# Altium PCB I2C_Shield.PcbDoc
Units mil, origin at the board's own origin, x right, y up, seen from the top; angles counter-clockwise.
Board outline 2112.03 x 2253.37 mil, 2 copper layers (Top Layer, Bottom Layer); 32 components, 38 nets, 115 pads, 41 vias.
Unrouted connection lines stored in the file: 7.
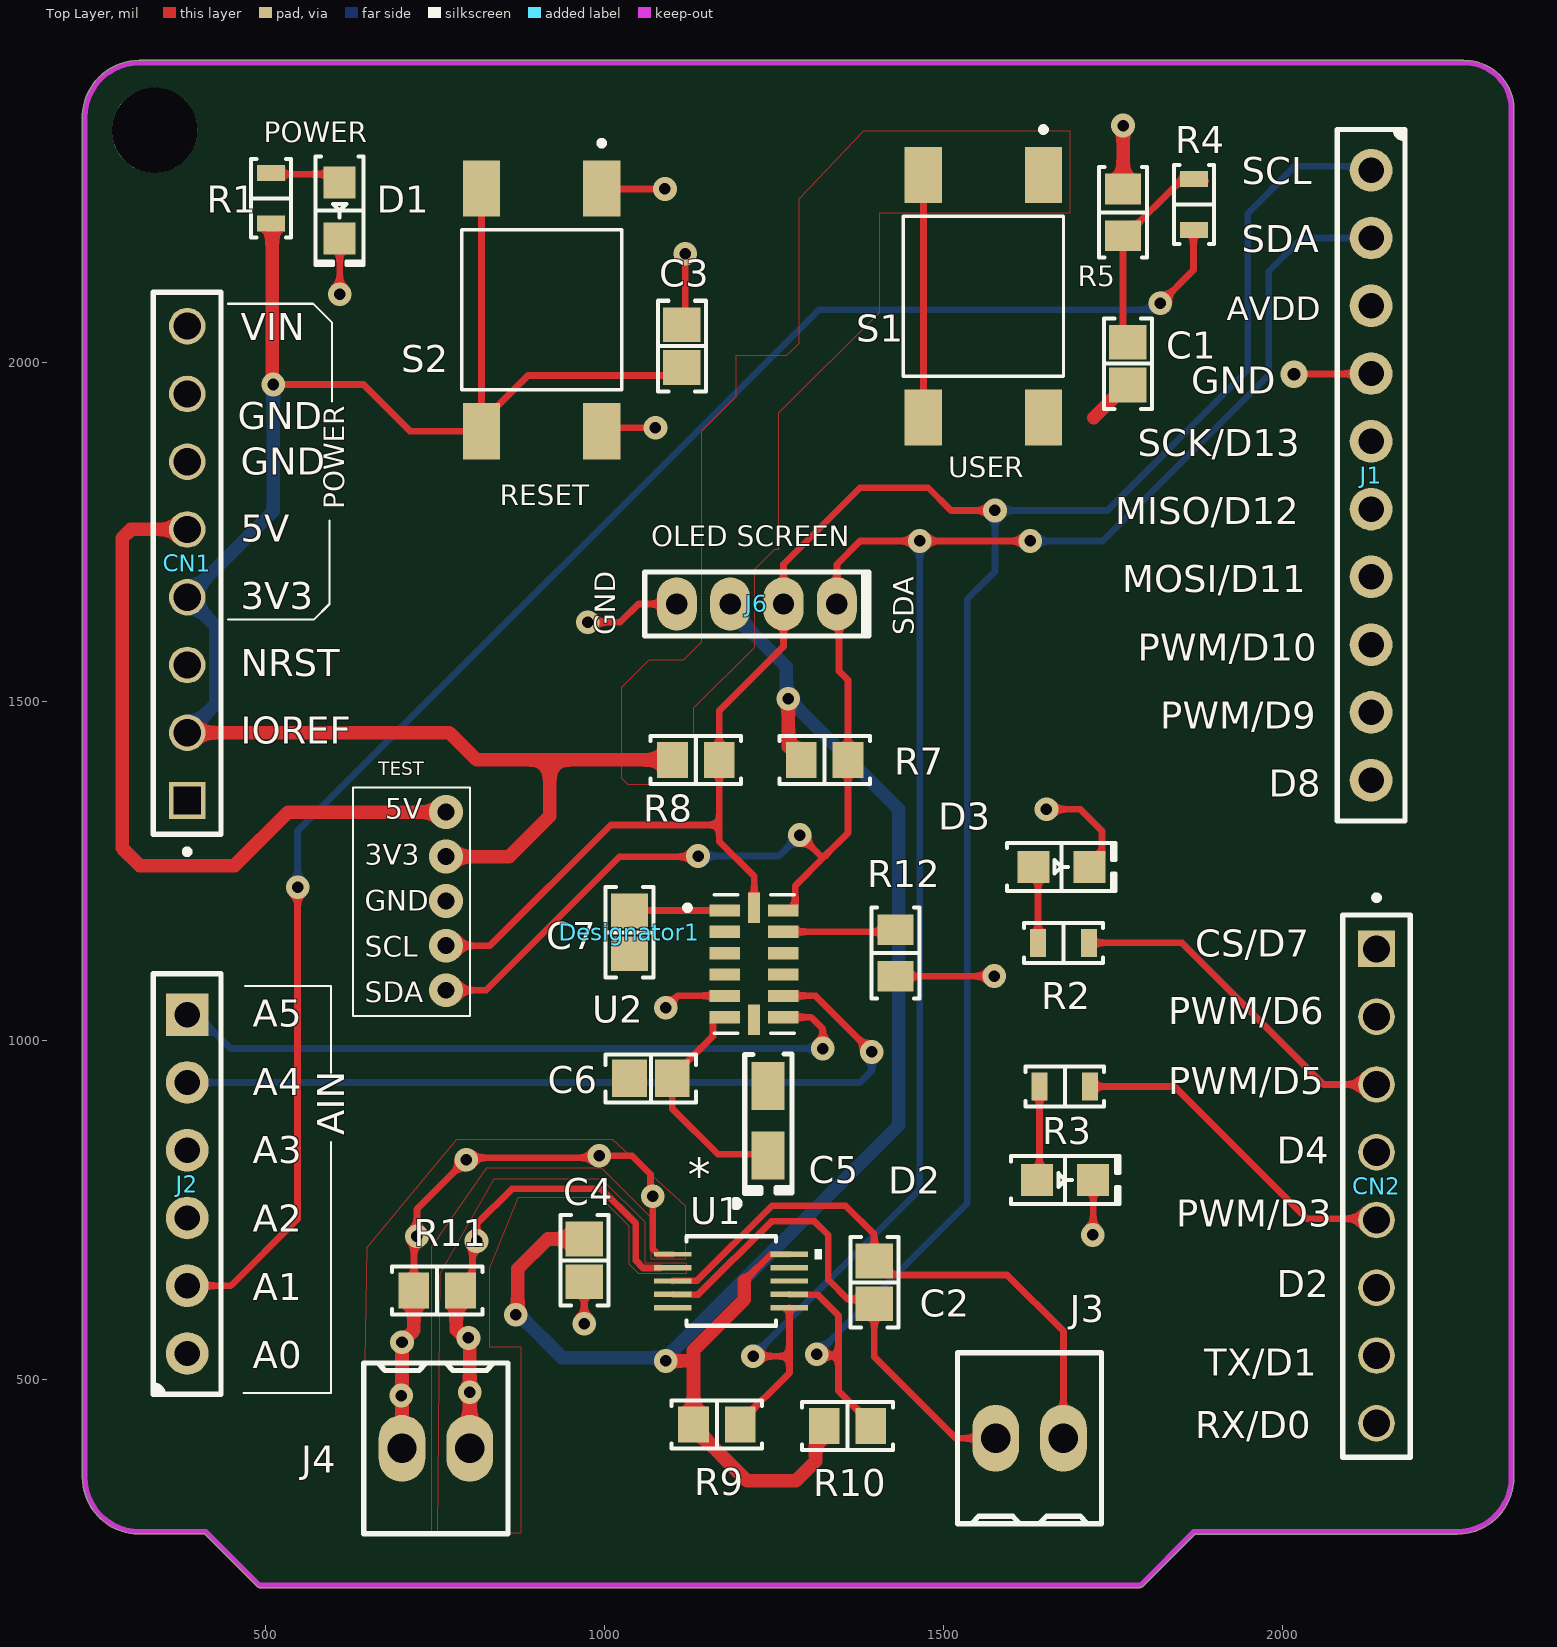
[diagram p0: Top Layer view]
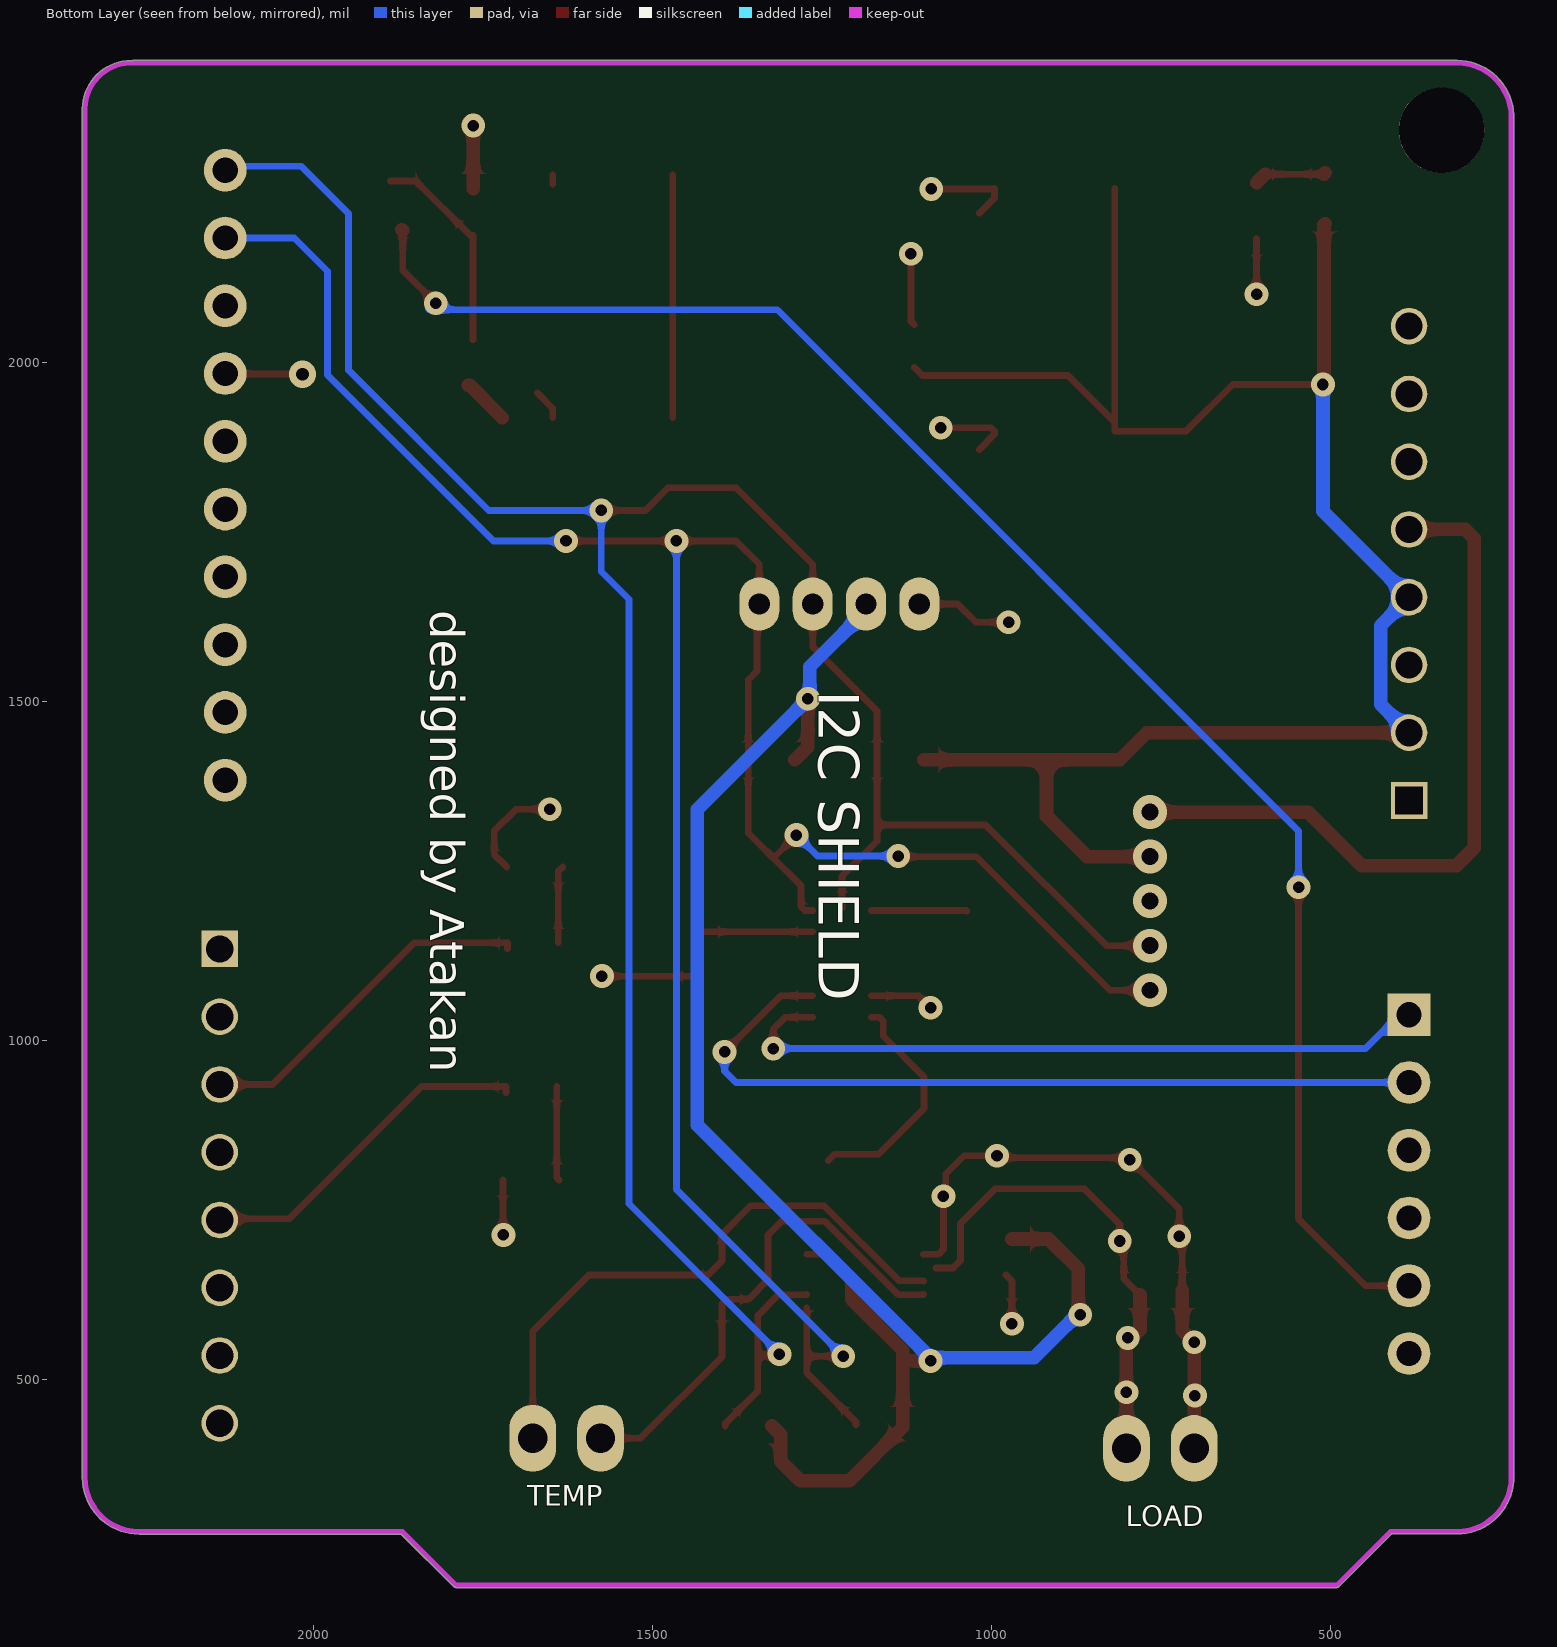
[diagram p1: Bottom Layer view, seen from below]
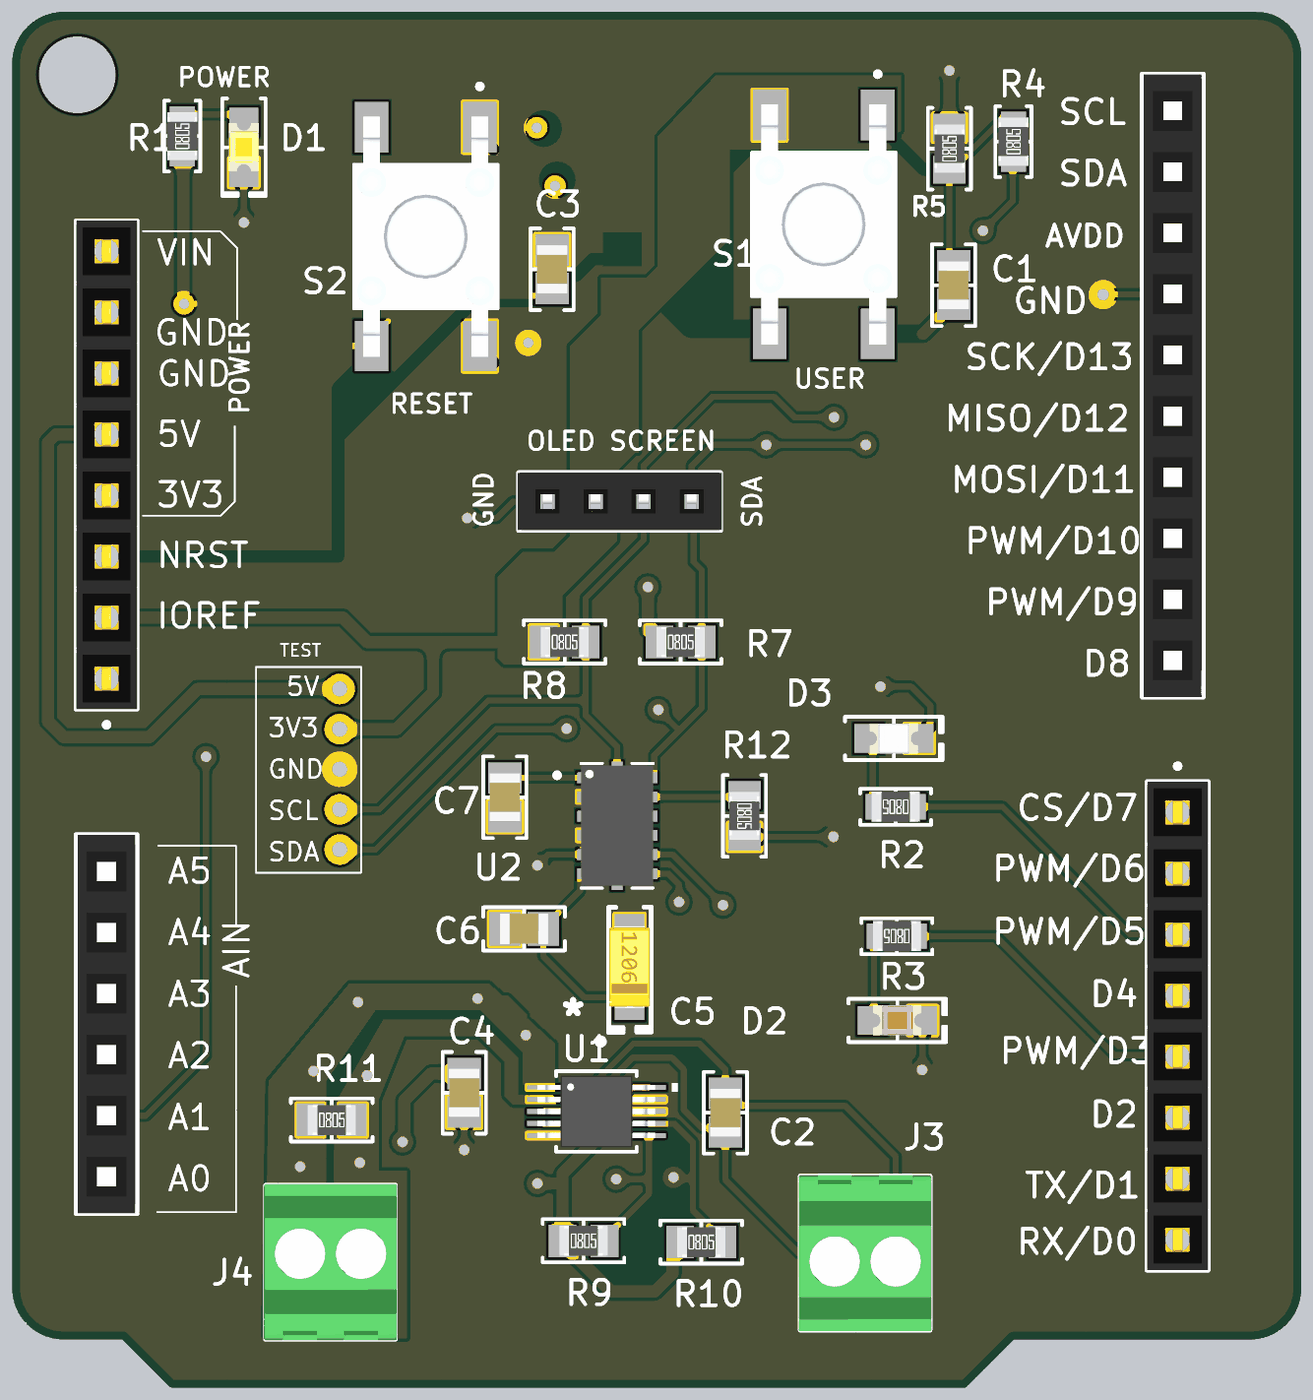
[diagram p2: 3D render of the assembled board from above, using the file's embedded part models]

## Layer stack, top to bottom
Top Solder: solder mask 0.4, Solder Resist, Dk 3.5
Top Layer: signal copper 1.4
Dielectric 1: dielectric 12.6, FR-4, Dk 4.8
Bottom Layer: signal copper 1.4
Bottom Solder: solder mask 0.4, Solder Resist, Dk 3.5

## Board outline
229.49,355.48 ccw(c313.26,355.48) 313.26,271.71 409.87,271.71 487.46,194.13 ccw(c491.01,197.68) 491.01,192.65 1790.23,192.65 ccw(c1790.23,197.68) 1793.78,194.13 1871.05,271.4 2257.71,271.4 ccw(c2257.74,273.91) 2257.74,271.39 ccw(c2257.74,355.17) 2341.52,355.17 2341.52,2374.23 ccw(c2269.88,2374.23) 2269.88,2445.87 2268.06,2445.87 ccw(c2267,2440.95) 2267,2445.98 313.88,2445.98 ccw(c313.26,2440.99) 313.26,2446.02 ccw(c313.26,2362.25) 229.53,2364.81 ccw(c234.52,2364.18) 229.49,2364.18 229.49,355.5 ccw(c232,355.48)

## Design rules (kind name [scope] priority, off if disabled: settings)
Clearance [All] p1: gap=5 ignorepadtopadclearanceinfootprint=FALSE except(0: Fill-Hole Poly-Hole Region-Hole Text-Hole; 10: Text-Text)
ComponentClearance [All] p1: gap=10 collisioncheckmode=3 verticalgap=-100 showdistances=FALSE
HoleSize [All] p1: absolutevalues=TRUE maxlimit=200 minlimit=6 maxpercent=80.000 minpercent=20.000
MinimumSolderMaskSliver [All] p1: minsoldermaskwidth=3.14
PolygonConnect [All] p1: connectstyle=Direct reliefconductorwidth=10 reliefentries=4 polygonreliefangle="90 Angle" airgapwidth=10
RoomDefinition I2C_Shield [InComponentClass('I2C_Shield')] p1: confinementstyle=ConfineIn formatcopy=TRUE lockcomponents=FALSE outline -3820,-1341 -1820,-1341 -1820,-341 -3820,-341
RoutingVias [All] p1: holewidth=17 width=35 viastyle="Through Hole" minholewidth=15 minwidth=30 maxholewidth=28 maxwidth=50
SilkToSilkClearance [All] p1: silktosilkclearance=5.5
SilkToSolderMaskClearance [IsText] p1: minsilkscreentomaskgap=4 clearancetoexposedcopper=TRUE
SolderMaskExpansion [All] p1: expansion=4
Width [All] p1: maxlimit=30 minlimit=10 preferedwidth=20 minimp=50.000000 maximp=50.000000 favimp=50.000000
25 further rules are at their usual default settings.

## Components (designator, comment, footprint, x,y, rotation, side; value= is the part's Value field where it differs from the comment)
C1 "0.1 µF" "CAP 0805_2012" 1772,1998.52 r270 top
C2 "470 pF" "CAP 0805_2012" 1398,643 r270 top
C3 "0.1 µF" "CAP 0805_2012" 1114,2024.52 r90 top
C4 "0.1 µF" "CAP 0805_2012" 970,675.5 r270 top
C5 "10 µF" "CAP POL 1206_3216" 1241,881.43 r90 top
C6 "0.1µF" "CAP 0805_2012" 1068.13,944 r180 top
CN1 "8x1_Header_2.54" 8X1_HEADER#1 384,1704 r90 top
CN2 "8x1_Header_2.54" 8X1_HEADER#2 2139,785 r270 top
D1 "Yellow" "LED 0805_2012 YELLOW" 609,2224.34 r270 top
D2 "Red" "LED 0805_2012 RED" 1679.66,794 r0 top
D3 "White" "LED 0805_2012" 1674,1256 r0 top
Designator1 "0.1µF" "CAP 0805_2012" 1036.63,1159.5 r270 top (schematic designator C7)
J1 "SSW-110-03-T-S" "SAMTEC SSW-110-03-T-S" 2131,1834 r270 top
J2 "SSW-106-03-T-S" "SAMTEC SSW-106-03-T-S" 384,788 r90 top
J3 "282834-2" "TE 282834-2" 1627,413 r180 top
J4 "282834-2" "TE 282834-2" 751,398 r0 top
J6 "NPPN041BFCN-RC" "SULLINS NPPN041BFCN" 1224.63,1644 r180 top
R1 "470 Ohms" "YAGEO RES RK73 RS73 SG73 0805_2012" 508,2242.6 r90 top
R2 "470 Ohms" "YAGEO RES RK73 RS73 SG73 0805_2012" 1677,1144 r180 top
R3 "470 Ohms" "YAGEO RES RK73 RS73 SG73 0805_2012" 1679,932 r180 top
R4 "470 Ohms" "YAGEO RES RK73 RS73 SG73 0805_2012" 1870,2233.6 r90 top
R5 "10 kOhms" "RES 0805_2012" 1765.03,2222 r90 top
R7 "4.7k" "RES 0805_2012" 1324.63,1414 r0 top
R8 "4.7k" "RES 0805_2012" 1134.63,1414 r0 top
R9 "4.7k" "RES 0805_2012" 1165.55,433 r0 top
R10 "4.7k" "RES 0805_2012" 1358.45,431 r0 top
R11 "10 mOhms" "RES 0805_2012" 753,631 r0 top
R12 "10 kOhms" "RES 0805_2012" 1429.31,1129 r270 top
S1 "6MM_BUTON" 6MMTACTILESWITCH 1559,2098 r270 top
S2 "6MM_BUTON" 6MMTACTILESWITCH 907,2078 r270 top
U1 "LTC2990IMS#PBF" MSOP-10_MS 1186.61,645 r0 top
U2 "ADXL345BCCZ" IC_ADXL345BCCZ 1220.63,1113 r0 top

## Footprints (in the part's own frame and the unit in brackets; to place one, negate y for a bottom-side part, rotate by r counter-clockwise, add the part's x,y. Pads: shape width x height; smd on the part's side, far side on the other; paste and mask are expansions set on the pad)
6MMTACTILESWITCH [mm]
  rect 2.1x1.4 smd: 1(-4.55,2.25) 2(-4.55,-2.25) 3(4.55,2.25) 4(4.55,-2.25)
  silkscreen extent -6.35,-3 3,3, body extent -5,-3 5,3, height 9.5
8X1_HEADER#1 [mm]
  rect 1.37x1.37 hole 1.016 square: 01(-8.89,0)
  round 1.37 hole 1.02: 02(-6.35,0) 03(-3.81,0) 04(-1.27,0) 05(1.27,0) 06(3.81,0) 07(6.35,0) 08(8.89,0)
  silkscreen extent -10.91,-1.27 10.16,1.27, body extent -10.16,-1.27 10.16,1.27, height 8.5
8X1_HEADER#2 [mm]
  rect 1.37x1.37 hole 1.02: 01(-8.89,0)
  round 1.37 hole 1.02: 02(-6.35,0) 03(-3.81,0) 04(-1.27,0) 05(1.27,0) 06(3.81,0) 07(6.35,0) 08(8.89,0)
  silkscreen extent -10.91,-1.27 10.16,1.27, body extent -10.16,-1.27 10.16,1.27, height 8.5
"CAP 0805_2012" [mm] "Chip Capacitor, 2-Leads, Body 2.00x1.20mm, IPC Medium Density"
  rect 1.3x1.4 smd: 1(-0.8,0) 2(0.8,0)
  silkscreen extent -1.7,-0.9 1.7,0.9, body extent -1,-0.64 1,0.64, height 1.26
"CAP POL 1206_3216" [mm] "Molded Capacitor, 2-Leads, Body 3.20x1.6mm, IPC Medium Density"
  rect 1.8x1.23 smd: 1(-1.31,0) 2(1.31,0)
  silkscreen extent -3.22,-0.9 2.5,1.32, body extent -1.72,-0.85 1.71,0.85, height 1.7
IC_ADXL345BCCZ [mm]
  rect 1.145x0.457 smd: 1(-1.098,2) 2(-1.098,1.2) 3(-1.098,0.4) 4(-1.098,-0.4) 5(-1.098,-1.2) 6(-1.098,-2) 8(1.098,-2) 9(1.098,-1.2) 10(1.098,-0.4) 11(1.098,0.4) 12(1.098,1.2) 13(1.098,2)
  rect 0.457x1.145 smd: 7(0,-2.097) 14(0,2.097)
  silkscreen extent -2.6,-2.6 1.5,2.6, body extent -1.5,-2.5 1.5,2.5, height 1
"LED 0805_2012" [mm] "Chip Diode, 2-Leads, Body 2.00x1.25mm, IPC Medium Density"
  rect 1.2x1.2 smd: 1(-1.05,0) 2(1.05,0)
  silkscreen extent -2.03,-0.9 2.03,0.9, body extent -1,-0.62 1,0.63, height 0.9
"LED 0805_2012 RED" [mm] "Chip Diode, 2-Leads, Body 2.00x1.25mm, IPC Medium Density"
  rect 1.2x1.2 smd: 1(-1.05,0) 2(1.05,0)
  silkscreen extent -2.03,-0.9 2.03,0.9, body extent -1,-0.62 1,0.63, height 0.9
"LED 0805_2012 YELLOW" [mm] "Chip Diode, 2-Leads, Body 2.00x1.25mm, IPC Medium Density"
  rect 1.2x1.2 smd: 1(-1.05,0) 2(1.05,0)
  silkscreen extent -2.03,-0.9 2.03,0.9, body extent -1,-0.62 1,0.63, height 0.9
MSOP-10_MS [mil]
  rect 55x7 smd mask+4: 1(-86,39.4)
  rect 55x8 smd: 2(-86,19.7) 3(-86,0) 4(-86,-19.7) 5(-86,-39.4) 6(86,-39.4) 7(86,-19.7) 8(86,0) 9(86,19.7) 10(86,39.4)
  silkscreen extent -66,-66 134,66, body extent -96,-59 96,59, height 43
"RES 0805_2012" [mm] "Chip Resistor, 2-Leads, Body 2.00x1.25mm, IPC Medium Density"
  rect 1.15x1.35 smd: 1(-0.875,0) 2(0.875,0)
  silkscreen extent -1.7,-0.9 1.7,0.9, body extent -1,-0.62 1,0.63, height 0.6
"SAMTEC SSW-106-03-T-S" [mm]
  oval 1.6x1.6 hole 0.95: 1(-6.35,0) 2(-3.81,0) 3(-1.27,0) 4(1.27,0) 5(3.81,0)
  rect 1.6x1.6 hole 0.95: 6(6.35,0)
  silkscreen extent -7.88,-1.27 7.88,1.27, body extent -7.87,-1.21 7.87,1.21, height 8.51
"SAMTEC SSW-110-03-T-S" [mm]
  oval 1.6x1.6 hole 0.95: 1(-11.43,0) 2(-8.89,0) 3(-6.35,0) 4(-3.81,0) 5(-1.27,0) 6(1.27,0) 7(3.81,0) 8(6.35,0) 9(8.89,0) 10(11.43,0)
  silkscreen extent -12.96,-1.27 12.96,1.27, body extent -12.95,-1.21 12.95,1.21, height 8.51
"SULLINS NPPN041BFCN" [mm]
  oval 1.5x2 hole 0.8: 1(-3,0) 2(-1,0) 3(1,0) 4(3,0)
  silkscreen extent -4.2,-1.2 4.2,1.2, body extent -4.25,-1.2 4.25,1.2, height 4.41
"TE 282834-2" [mm]
  oval 1.75x2.5 hole 1.1: 1(-1.27,0) 2(1.27,0)
  silkscreen extent -2.7,-3.2 2.7,3.2, body extent -2.77,-3.25 2.77,3.25, height 10
"YAGEO RES RK73 RS73 SG73 0805_2012" [mm] "Chip Resistor, 2-Leads, Body 2.00x1.25mm"
  rect 0.6x1.05 smd: 1(-0.95,0) 2(0.95,0)
  silkscreen extent -1.48,-0.75 1.48,0.75, body extent -1,-0.62 1,0.63, height 0.6

## Part data
C1 C3: library part 0805B104K160CT, "CAP CER 0.1UF 16V X7R 0805", Device Package="0805 (2012 Metric)", Manufacturer="Walsin Technology Corporation", Operating Temperature="-55°C ~ 125°C", Supplier Part Number 1=1292-1565-1-ND, Temperature Coefficient=X7R, Tolerance=±10%, Voltage - Rated=16V, Applications="General Purpose", componentlink1description=Datasheet, componentlink1url=http://www.passivecomponent.com/wp-content/uploads/2018/10/MLCC.pdf, componentlink2description="DigiKey Link", componentlink2url=https://www.digikey.com/en/products/detail/walsin-technology-corporation/0805B104K160CT/9355062, lastupdated="9.02.2024 20:16:02", Lifecycle Status=Active, Minimum Order=1, Mounting Type="Surface Mount, MLCC", Package / Case="0805 (2012 Metric)", packaging=TapeAndReel, partid=4882, Part Number=0805B104K160CT, Part Status=Active, price=0.01, series=-, Size / Dimension="0.079\" L x 0.049\" W (2.00mm x 1.25mm)", Supplier 1=DigiKey, Thickness (Max)="0.035\" (0.90mm)"
  C1: Capacitance="0.1 µF"
C2: library part 885012207006, "CAP CER 470PF 10V X7R 0805", Device Package="0805 (2012 Metric)", Manufacturer="Würth Elektronik", Operating Temperature="-55°C ~ 125°C", Supplier Part Number 1=732-8016-1-ND, Temperature Coefficient=X7R, Tolerance=±10%, Voltage - Rated=10V, Applications="General Purpose", Capacitance="470 pF", componentlink1description=Datasheet, componentlink1url=https://katalog.we-online.de/pbs/datasheet/885012207006.pdf, componentlink2description="DigiKey Link", componentlink2url=https://www.digikey.com/en/products/detail/würth-elektronik/885012207006/5453871, lastupdated="9.02.2024 20:15:30", Lifecycle Status=Active, Minimum Order=1, Mounting Type="Surface Mount, MLCC", Package / Case="0805 (2012 Metric)", packaging=TapeAndReel, partid=42624, Part Number=885012207006, Part Status=Active, price=0.03, series=WCAP-CSGP, Size / Dimension="0.079\" L x 0.049\" W (2.00mm x 1.25mm)", Supplier 1=DigiKey, Thickness (Max)="0.035\" (0.90mm)"
C4: library part LMK212SD104KG-T, "CAP CER 0.1UF 10V 0805", Device Package="0805 (2012 Metric)", Manufacturer="Taiyo Yuden", Operating Temperature="-55°C ~ 125°C", Supplier Part Number 1=587-1134-1-ND, Tolerance=±10%, Voltage - Rated=10V, Applications="General Purpose", Capacitance="0.1 µF", componentlink1description=Datasheet, componentlink1url=http://www.yuden.co.jp/productdata/catalog/mlcc07_e.pdf, componentlink2description="DigiKey Link", componentlink2url=https://www.digikey.com/en/products/detail/taiyo-yuden/LMK212SD104KG-T/930486, Features="Low Distortion", lastupdated="9.02.2024 20:15:36", Lifecycle Status=Active, Minimum Order=1, Mounting Type="Surface Mount, MLCC", Package / Case="0805 (2012 Metric)", packaging=TapeAndReel, partid=14462, Part Number=LMK212SD104KG-T, Part Status=Active, price=0.06, series=CFCAP™, Size / Dimension="0.079\" L x 0.049\" W (2.00mm x 1.25mm)", Supplier 1=DigiKey, Thickness (Max)="0.053\" (1.35mm)"
C5: library part 593D106X9010A2TE3, "CAP TANT 10UF 10% 10V 1206", Device Package="1206 (3216 Metric)", ESR (Equivalent Series Resistance)=2Ohm, Manufacturer="Vishay Sprague", Manufacturer Size Code=A, Operating Temperature="-55°C ~ 125°C", Supplier Part Number 1=718-1969-1-ND, Tolerance=±10%, Voltage - Rated="10 V", Capacitance="10 µF", componentlink1description=Datasheet, componentlink1url=http://www.vishay.com/docs/40005/593d.pdf, componentlink2description="DigiKey Link", componentlink2url=https://www.digikey.com/en/products/detail/vishay-sprague/593D106X9010A2TE3/1579064, Features="General Purpose", Height - Seated (Max)="0.071\" (1.80mm)", lastupdated="3.06.2024 19:29:35", Lifecycle Status=Active, Minimum Order=1, Mounting Type="Surface Mount", Package / Case="1206 (3216 Metric)", packaging=TapeAndReel, partid=896, Part Number=593D106X9010A2TE3, Part Status=Active, price=0.09, series="TANTAMOUNT™, 593D", Size / Dimension="0.126\" L x 0.063\" W (3.20mm x 1.60mm)", Supplier 1=DigiKey, Type=Molded
C6 Designator1: library part 08053C104JAT4A, "CAP CER 0.1UF 25V X7R 0805", Device Package="0805 (2012 Metric)", Manufacturer="AVX Corporation", Operating Temperature="-55°C ~ 125°C", Supplier Part Number 1=478-13051-1-ND, Temperature Coefficient=X7R, Tolerance=±5%, Voltage - Rated=25V, Applications="General Purpose", Capacitance=0.1µF, componentlink1description=Datasheet, componentlink1url=http://datasheets.avx.com/X7RDielectric.pdf, componentlink2description="DigiKey Link", componentlink2url=http://digikey.com/product-detail/en/avx-corporation/08053C104JAT4A/478-13051-1-ND/9948569, lastupdated="2.09.2020 01:04:39", Lifecycle Status=Active, Minimum Order=1, Mounting Type="Surface Mount, MLCC", Package / Case="0805 (2012 Metric)", packaging=TapeAndReel, partid=3721, Part Number=08053C104JAT4A, Part Status=Active, price=0.04, series=-, Size / Dimension="0.079\" L x 0.049\" W (2.01mm x 1.25mm)", Supplier 1=DigiKey, Thickness (Max)="0.037\" (0.94mm)"
D1: library part 5975406507F, "LED YELLOW 0805 SMD", Current - Test=20mA, Device Package="0805 (2012 Metric)", Lens Color=0.93mm, Manufacturer=Dialight, Millicandela Rating=160mcd, Supplier Device Package=0805, Supplier Part Number 1=350-4387-1-ND, Voltage - Forward (Vf) (Typ)=2V, Color=Yellow, componentlink1description=Datasheet, componentlink1url=http://www.dialightsignalsandcomponents.com/Assets/Drawings/2D_Drawings_DrawingDetailedSpec/NewDrawings/18370A.pdf, componentlink2description="DigiKey Link", componentlink2url=https://www.digikey.com/en/products/detail/dialight/5975406507F/9385442, Configuration=Standard, Height (Max)=0.93mm, lastupdated="3.06.2024 20:01:27", Lens Size="1.40mm x 1.24mm", Lens Style="Rectangle with Flat Top", Lifecycle Status=Active, Minimum Order=1, Mounting Type="Surface Mount", Package / Case="0805 (2012 Metric)", packaging=TapeAndReel, partid=53, Part Number=5975406507F, Part Status=Active, price=0.12, series=597, Size / Dimension="2.00mm L x 1.25mm W", Supplier 1=DigiKey, Wavelength - Dominant=590nm
D2: library part "LS R976-NR-1", "LED RED DIFFUSED 0805 SMD", Current - Test=20mA, Device Package="0805 (2012 Metric)", Lens Color=White, Manufacturer="OSRAM Opto Semiconductors Inc.", Millicandela Rating=104mcd, Supplier Device Package=0805, Supplier Part Number 1=475-1278-1-ND, Voltage - Forward (Vf) (Typ)=2V, Color=Red, componentlink1description=Datasheet, componentlink1url=https://dammedia.osram.info/media/resource/hires/osram-dam-2493505/LS%20R976.pdf, componentlink2description="DigiKey Link", componentlink2url=https://www.digikey.com/en/products/detail/osram-opto-semiconductors-inc/LS-R976-NR-1/1227987, Configuration=Standard, Height (Max)=0.90mm, lastupdated="3.06.2024 20:00:06", Lens Size="1.30mm x 1.25mm", Lens Style="Rectangle with Flat Top", Lens Transparency=Diffused, Lifecycle Status=Active, Minimum Order=1, Mounting Type="Surface Mount", Package / Case="0805 (2012 Metric)", packaging=TapeAndReel, partid=349, Part Number="LS R976-NR-1", Part Status=Active, price=0.03, series="CHIPLED 0805", Size / Dimension="2.00mm L x 1.25mm W", Supplier 1=DigiKey, Viewing Angle=160°, Wavelength - Dominant=633nm, Wavelength - Peak=645nm
D3: library part B1701TX--20P000614U1930, "LED WHITE 0805 SMD", Current - Test=20mA, Device Package="0805 (2012 Metric)", Lens Color=Yellow, Manufacturer="Harvatek Corporation", Millicandela Rating=450mcd, Supplier Device Package=0805, Supplier Part Number 1=3147-B1701TX--20P000614U1930CT-ND, Voltage - Forward (Vf) (Typ)=3.2V, Color=White, componentlink1description=Datasheet, componentlink1url=https://media.digikey.com/pdf/Data%20Sheets/Harvatek%20PDFs/B1701TX--20P000614U1930.pdf, componentlink2description="DigiKey Link", componentlink2url=https://www.digikey.com/en/products/detail/harvatek-corporation/B1701TX-20P000614U1930/16671745, Height (Max)=0.90mm, lastupdated="3.06.2024 20:04:49", Lens Size="1.40mm x 1.30mm", Lens Style="Rectangle with Flat Top", Lifecycle Status=Active, Minimum Order=1, Mounting Type="Surface Mount", Package / Case="0805 (2012 Metric)", packaging=TapeAndReel, partid=1196, Part Number=B1701TX--20P000614U1930, Part Status=Active, price=0.12, series=B1701TX, Size / Dimension="2.00mm L x 1.30mm W", Supplier 1=DigiKey, Viewing Angle="130°, 140°"
J1: "CONN RCPT 10POS 0.1 TIN PCB", Current Rating (Amps)="5.7A per Contact", Insulation Color=Black, Manufacturer="Samtec Inc.", Material Flammability Rating="UL94 V-0", Operating Temperature="-55°C ~ 105°C", Supplier Part Number 1=SSW-110-03-T-S-ND, componentlink2description="DigiKey Link", componentlink2url=https://www.digikey.com/en/products/detail/samtec-inc/SSW-110-03-T-S/7877438, Connector Type=Receptacle, Contact Finish - Mating=Tin, Contact Finish - Post=Tin, Contact Length - Post="0.394\" (10.00mm)", Contact Type=Forked, Fastening Type=Push-Pull, Insulation Height="0.335\" (8.51mm)", lastupdated="21.06.2022 15:10:16", Lifecycle Status=Active, Minimum Order=1, Mounting Type="Through Hole", Number of Positions=10, Number of Positions Loaded=All, Number of Rows=1, packaging=Bulk, Part Number=SSW-110-03-T-S, Part Status=Active, Pitch - Mating="0.100\" (2.54mm)", price=0.91, series=SSW, Style="Board to Board or Cable", Supplier 1=DigiKey, Termination=Solder
J2: "CONN RCPT 6POS 0.1 TIN PCB", Current Rating (Amps)="5.7A per Contact", Insulation Color=Black, Manufacturer="Samtec Inc.", Material Flammability Rating="UL94 V-0", Operating Temperature="-55°C ~ 105°C", Supplier Part Number 1=SAM8865-ND, componentlink1description=Datasheet, componentlink1url=http://suddendocs.samtec.com/prints/ssw-s.pdf, componentlink2description="DigiKey Link", componentlink2url=https://www.digikey.com/en/products/detail/samtec-inc/SSW-106-03-T-S/1790202, Connector Type=Receptacle, Contact Finish - Mating=Tin, Contact Finish - Post=Tin, Contact Length - Post="0.394\" (10.00mm)", Contact Type=Forked, Fastening Type=Push-Pull, Insulation Height="0.335\" (8.51mm)", lastupdated="21.06.2022 15:09:22", Lifecycle Status=Active, Minimum Order=1, Mounting Type="Through Hole", Number of Positions=6, Number of Positions Loaded=All, Number of Rows=1, packaging=Bulk, Part Number=SSW-106-03-T-S, Part Status=Active, Pitch - Mating="0.100\" (2.54mm)", price=0.55, series=SSW, Style="Board to Board or Cable", Supplier 1=DigiKey, Termination=Solder
J3 J4: "TERM BLK 2P SIDE ENT 2.54MM PCB", Color=Green, Current=10A, Manufacturer="TE Connectivity AMP Connectors", Supplier Part Number 1=A98333-ND, Voltage=150V, componentlink1description=Datasheet, componentlink1url=https://www.te.com/commerce/DocumentDelivery/DDEController?Action=srchrtrv&DocNm=282834&DocType=Customer+Drawing&DocLang=English, componentlink2description="DigiKey Link", componentlink2url=http://digikey.com/product-detail/en/te-connectivity-amp-connectors/282834-2/A98333-ND/1150135, lastupdated="15.01.2020 04:15:38", Lifecycle Status=Active, Mating Orientation="Horizontal with Board", Minimum Order=1, Mounting Type="Through Hole", Number of Levels=1, packaging=Bulk, Part Number=282834-2, Part Status=Active, Pitch="0.100\" (2.54mm)", Positions Per Level=2, price=0.88, series=Buchanan, Supplier 1=DigiKey, Wire Gauge="16-30 AWG", Wire Termination="Screw - Rising Cage Clamp"
J6: "CONN HDR 4POS 0.079 GOLD PCB", Current Rating (Amps)=2A, Insulation Color=Black, Manufacturer="Sullins Connector Solutions", Material Flammability Rating="UL94 V-0", Operating Temperature="-40°C ~ 105°C", Supplier Part Number 1=S5751-04-ND, componentlink1description=Datasheet, componentlink1url=https://drawings-pdf.s3.amazonaws.com/10483.pdf, componentlink2description="DigiKey Link", componentlink2url=https://www.digikey.com/en/products/detail/sullins-connector-solutions/NPPN041BFCN-RC/804806, Connector Type=Header, Contact Finish - Mating=Gold, Contact Finish - Post=Gold, Contact Finish Thickness - Mating=Flash, Contact Length - Post="0.094\" (2.40mm)", Contact Type="Female Socket", Fastening Type=Push-Pull, Insulation Height="0.173\" (4.40mm)", lastupdated="21.06.2022 14:42:51", Lifecycle Status=Active, Minimum Order=1, Mounting Type="Through Hole", Number of Positions=4, Number of Positions Loaded=All, Number of Rows=1, packaging=Tube, Part Number=NPPN041BFCN-RC, Part Status=Active, Pitch - Mating="0.079\" (2.00mm)", price=0.30, series=-, Style="Board to Board", Supplier 1=DigiKey, Termination=Solder
R1 R2 R3 R4: library part RK73G2ARTTD4700D, "RES 470 OHM 0.5% 1/8W 0805", Device Package="0805 (2012 Metric)", Manufacturer="KOA Speer Electronics, Inc.", Operating Temperature="-55°C ~ 155°C", Power (Watts)="0.125W, 1/8W", Ratings=AEC-Q200, Supplier Device Package=0805, Supplier Part Number 1=2019-RK73G2ARTTD4700DCT-ND, Temperature Coefficient=±50ppm/°C, Tolerance=±0.5%, componentlink1description=Datasheet, componentlink1url=https://www.koaspeer.com/pdfs/RK73G-RT.pdf, componentlink2description="DigiKey Link", componentlink2url=https://www.digikey.com/en/products/detail/koa-speer-electronics-inc/RK73G2ARTTD4700D/16968130, Composition="Thick Film", Features="Anti-Sulfur, Automotive AEC-Q200", Height - Seated (Max)="0.024\" (0.60mm)", lastupdated="25.07.2024 09:45:10", Lifecycle Status=Active, Minimum Order=1, Number of Terminations=2, Package / Case="0805 (2012 Metric)", packaging=TapeAndReel, partid=90317, Part Number=RK73G2ARTTD4700D, price=0.04, Resistance="470 Ohms", series=RK73G-RT, Size / Dimension="0.079\" L x 0.049\" W (2.00mm x 1.25mm)", Supplier 1=DigiKey
R5 R12: library part RNCS0805BKE10K0, "RES 10K OHM 0.1% 1/10W 0805", Device Package="0805 (2012 Metric)", Manufacturer="Stackpole Electronics Inc", Operating Temperature="-55°C ~ 155°C", Power (Watts)="0.1W, 1/10W", Ratings=AEC-Q200, Supplier Device Package=0805, Supplier Part Number 1=RNCS0805BKE10K0CT-ND, Temperature Coefficient=±25ppm/°C, Tolerance=±0.1%, componentlink1description=Datasheet, componentlink1url=https://www.seielect.com/catalog/sei-rncs_rnch.pdf, componentlink2description="DigiKey Link", componentlink2url=https://www.digikey.com/en/products/detail/stackpole-electronics-inc/RNCS0805BKE10K0/1800067, Composition="Thin Film", Features="Anti-Corrosive, Automotive AEC-Q200, Moisture Resistant", Height - Seated (Max)="0.026\" (0.65mm)", lastupdated="8.02.2024 21:02:39", Lifecycle Status=Active, Minimum Order=1, Number of Terminations=2, Package / Case="0805 (2012 Metric)", packaging=TapeAndReel, partid=27713, Part Number=RNCS0805BKE10K0, Part Status=Active, price=0.07, Resistance="10 kOhms", series=RNCS, Size / Dimension="0.079\" L x 0.049\" W (2.00mm x 1.25mm)", Supplier 1=DigiKey
R7 R8 R9 R10: library part RCS08054K70JNEA, "RES SMD 4.7K OHM 5% 1/2W 0805", Device Package="0805 (2012 Metric)", Manufacturer="Vishay Dale", Operating Temperature="-55°C ~ 155°C", Power (Watts)="0.5W, 1/2W", Ratings=AEC-Q200, Resistance="4.7 kOhms", Supplier Device Package=0805, Supplier Part Number 1=541-2866-1-ND, Temperature Coefficient=±200ppm/°C, Tolerance=±5%, componentlink1description=Datasheet, componentlink1url=http://www.vishay.com/docs/20065/rcse3.pdf, componentlink2description="DigiKey Link", componentlink2url=https://www.digikey.com/en/products/detail/vishay-dale/RCS08054K70JNEA/5867012, Composition="Thick Film", Features="Automotive AEC-Q200, Pulse Withstanding", Height - Seated (Max)="0.020\" (0.50mm)", lastupdated="8.02.2024 21:02:38", Lifecycle Status=Active, Minimum Order=1, Number of Terminations=2, Package / Case="0805 (2012 Metric)", packaging=TapeAndReel, partid=27839, Part Number=RCS08054K70JNEA, Part Status=Active, price=0.02, series="RCS e3", Size / Dimension="0.079\" L x 0.049\" W (2.00mm x 1.25mm)", Supplier 1=DigiKey
R11: library part CSRF0805FT10L0, "RES 0.01 OHM 1% 1/2W 0805", Device Package="0805 (2012 Metric)", Manufacturer="Stackpole Electronics Inc", Operating Temperature="-55°C ~ 170°C", Power (Watts)="0.5W, 1/2W", Ratings=AEC-Q200, Supplier Device Package=0805, Supplier Part Number 1=CSRF0805FT10L0CT-ND, Temperature Coefficient=±100ppm/°C, Tolerance=±1%, componentlink1description=Datasheet, componentlink1url=https://www.seielect.com/catalog/sei-csrf.pdf, componentlink2description="DigiKey Link", componentlink2url=https://www.digikey.com/en/products/detail/stackpole-electronics-inc/CSRF0805FT10L0/3477081, Composition="Metal Foil", Features="Automotive AEC-Q200, Current Sense, Moisture Resistant", Height - Seated (Max)="0.033\" (0.85mm)", lastupdated="8.02.2024 21:02:35", Lifecycle Status=Active, Minimum Order=1, Number of Terminations=2, Package / Case="0805 (2012 Metric)", packaging=TapeAndReel, partid=28462, Part Number=CSRF0805FT10L0, Part Status=Active, price=0.12, Resistance="10 mOhms", series=CSRF, Size / Dimension="0.079\" L x 0.049\" W (2.00mm x 1.25mm)", Supplier 1=DigiKey
S1 S2: "SWITCH TACT 6x6MM", Current=50mA, Package Size=6x6mm, Voltage Rate=12V, Link=https://ozdisan.com/elektromekanik-komponentler/sivicler-ve-anahtarlar/tact-sivicler/DS1042-03-116-KKR-250-10/586990
U1: "Quad I2C Voltage, Current and Temperature Monitor", Package="MSOP-10 Analog Devices", Availability="In Stock", Check_prices=https://www.snapeda.com/parts/LTC2990IMS%23PBF/Analog+Devices/view-part/?ref=eda, MF="Analog Devices", MP=LTC2990IMS#PBF, price=None, Purchase-URL=https://pricing.snapeda.com/search?q=LTC2990IMS#PBF&ref=eda, SnapEDA_Link=https://www.snapeda.com/parts/LTC2990IMS%23PBF/Analog+Devices/view-part/?ref=snap
U2: "3-Axis, ±2 g/±4 g/±8 g/±16 g Digital Accelerometer", Package="LGA -14 Analog Devices", Check_prices=https://www.snapeda.com/parts/ADXL345BCCZ/Analog+Devices/view-part/?ref=eda, MF="Analog Devices", MP=ADXL345BCCZ, SnapEDA_Link=https://www.snapeda.com/parts/ADXL345BCCZ/Analog+Devices/view-part/?ref=snap

## Free pads (board coordinates)
  round 125.98 hole 125.98 unplated: 0(336,2343)

## Via types
v1: diameter 35, hole 17, Top Layer to Bottom Layer, tented both sides, 31 vias
v2: diameter 50, hole 25, Top Layer to Bottom Layer, 5 vias
v3: diameter 35, hole 17, Top Layer to Bottom Layer, 4 vias
v4: diameter 40, hole 19, Top Layer to Bottom Layer, 1 vias

## Nets (pads, with @x,y where several pads share a name; then routed paths per layer and width w, separated by ;. In a path a pad name is that pad's centre, name@x,y a point inside that pad or via, vN(x,y) a via of type N, cw(c..) or ccw(c..) an arc to the next point about the centre after c; other vN are vias at no path point)
+5V: CN1.05 | length 1079.9
  Top Layer w20: CN1.05 301,1754 288,1741 288,1284 314,1258 454,1258 533,1337 v2(766,1337)
AVDD: J1.3
GND: C3.2 C4.2 C5.2 C6.2 CN1.06 CN1.07 D1.2 D2.2 D3.2 Designator1.2 J1.4 J6.4 R5.2 R12.2 S2.1 S2.3 U1.5 U1.8 U1.9 U2.2 U2.4 U2.5 | length 1303.8
  Top Layer w10: v1(609,2101) D1.2 ; v1(970,582) C4.2 ; C4.2@970,645.01 C4.2@979,654.01 ; v1(975,1617) 1023,1617 1050,1644 J6.4 ; S2.1 996.27,2256.45 v3(1089,2256.45) ; S2.3@1018.14,1871.97 995.58,1894.53 S2.3 1000.72,1904 v3(1075,1904) ; v1(1090,1048) 1107.76,1065.76 U2.5 ; C3.2 1119,2061.02 v3(1119,2161) ; R12.2 1574.55,1094.55 v1(1575,1095) ; v1(1652,1341) 1702,1341 1733.96,1309.04 1733.96,1274.62 D3.2 ; v1(1720.31,713) 1721,713.69 D2.2 ; v4(2017,1983) 2017.5,1983.5 2130.5,1983.5 J1.4
  Top Layer w20: R5.2 v1(1765.03,2350)
  other v2: 766,1205.5
NetC1_2: C1.2 R4.2 R5.1 S1.1 S1.3 | length 438.6
  Top Layer w10: S1.3 1647.58,1932.65 S1.3@1670.14,1955.2 ; S1.1@1647.58,2263.35 S1.1 ; R5.1@1764.96,2187.48 R5.1 ; 1765.03,2034.03 R5.1 ; R4.2@1887,2268.26 1849.68,2268.26 1768.97,2187.55 R5.1
  Top Layer w20: 1721.87,1918.87 1770.03,1967.02 C1.2
NetD1_1: D1.1 R1.2 | length 106.9
  Top Layer w10: R1.2@509.81,2278.19 D1.1@596.49,2278.19
  Top Layer w20: R1.2 R1.2@509.81,2278.19 ; D1.1@596.49,2278.19 D1.1
NetD2_1: D2.1 R3.2 | length 139.4
  Top Layer w10: D2.1 1641.6,797.28 R3.2
NetD3_1: D3.1 R2.2 | length 114.9
  Top Layer w10: D3.1 1639.6,1249.06 R2.2
NetR12_1: R12.1 U2.12 | length 166.8
  Top Layer w10: U2.12 1426.1,1160.24 R12.1
NRST: C1.1 C3.1 C4.1 C5.1 C6.1 CN1.02 CN1.03 CN1.04 Designator1.1 J6.3 R1.1 R7.1 R8.1 R9.1 R10.1 S1.2 S1.4 S2.2 S2.4 U1.10 U2.1 U2.6 | length 6259.3
  Top Layer w10: v3(511,1967.86) 644.14,1967.86 713,1899 818.28,1899 818.28,1912.51 S2.4@818.42,1912.65 ; S2.2 S2.4@818.42,1912.65 ; Designator1.1 1037.37,1191.74 U2.1 ; C3.1 1102.19,1981.21 886.98,1981.21 S2.4@818.42,1912.65 ; 1129.1,527 1131.1,525 ; U2.6 1165.71,1034.26 1159.88,1028.43 1159.88,1006.23 1099.62,945.97 C6.1 1099.62,899.38 1167,832 1232,832 C5.1@1241,823 ; 1206,645.23 1245.17,684.4 U1.10 ; S1.4 S1.2
  Top Layer w20: CN1.02 771,1454 811,1414 919,1414 ; R1.1 509.5,2203.7 509.5,1969.36 v3(511,1967.86) ; v2(766,1271.25) 859.25,1271.25 919,1331 919,1414 ; v1(869,595) 871.87,597.87 871.87,662.87 916,707 C4.1 ; v1(1090,527) 1129.1,527 ; R8.1 919,1414 ; J6.3@1177.79,1636.53 J6.3 ; 1206,645.23 1206,617.79 1131.1,542.89 1131.1,525 R9.1 1131.1,429.06 1210.17,350 1282,350 1311.36,379.36 1311.36,418.36 R10.1 ; v1(1271,1504) 1271,1433.18 R7.1
  Bottom Layer w10: v1@1087.5,529.5 v1(1090,527)
  Bottom Layer w20: CN1.02 425.97,1495.97 425.97,1612.03 CN1.04 511,1781 v3(511,1967.86) ; v1(869,595) 874,595 937,532 1091,532 1434,875 1434,1341 v1(1271,1504) 1268.13,1506.87 1268.13,1551.29 1185.26,1634.16 J6.3
PA0: J2.1
PA1: J2.2 R4.1 | length 2507.1
  Top Layer w10: J2.2 448.41,638 547,736.59 v1(547,1226) ; v1(1820,2087.74) 1869,2136.74 R4.1@1869,2195.2
  Top Layer w20: R4.1@1869,2195.2 R4.1
  Bottom Layer w10: v1(547,1226) 547,1309 1316.14,2078.14 v1@1830.14,2078.14
PA2/TX: CN2.07
PA3/RX: CN2.08
PA4: J2.3
PA5/SCK: J1.5
PA6/MISO: J1.6
PA7/MOSI: J1.7
PA8/CS: CN2.01
PA9: J1.10
PA10: CN2.06
PB0: J2.4
PB3: CN2.05 R3.1 | length 513.1
  Top Layer w10: R3.1@1716.4,923.14 R3.1 1841,932 2036,737 2137,737 CN2.05
PB4: CN2.03 R2.1 | length 520
  Top Layer w10: R2.1@1714.4,1135.14 R2.1 1852,1144 2061,935 CN2.03
PB5: CN2.04
PB6: J1.8
PB8/SCL: J1.1
PB9/SDA: J1.2
PB10: CN2.02
PC0: J2.6 U2.8 | length 1052.7
  Top Layer w10: U2.8 1304.28,1034.26 1322,1016.54 v1(1322,988)
  Bottom Layer w10: J2.6 398.12,1038 448.12,988 v1(1322,988)
PC1: J2.5 U2.9 | length 1209.5
  Top Layer w10: U2.9 1311.24,1065.76 v1(1394,983)
  Bottom Layer w10: J2.5 1377,938 1394,955 v1(1394,983)
PC7: J1.9
SCL/PB8: J6.2 R8.2 R10.2 U1.7 U2.14 | length 3975.5
  Top Layer w10: v2(766,1139.75) 830.75,1139.75 1009,1318 1169.08,1318 ; U2.14 1220.63,1242.37 1169.08,1293.92 1169.08,1318 ; U1.7 1273.11,624.8 1314.2,624.8 1345,594 1345,535 ; v1(1313,537) 1315,535 1345,535 ; R10.2 1392.9,434.94 1345,482.83 1345,535 ; v1(1576,1782) 1511,1782 1477.5,1815.5 1376.83,1815.5 1264,1702.67 J6.2 1264,1581 1169.08,1486.08 R8.2 1169.08,1318
  Bottom Layer w10: v1(1313,537) 1535,759 1535,1651 1576,1692 v1(1576,1782) 1742,1782 1949,1989 1949,2220 2019,2290 2125,2290 2131,2284
SDA/PB9: J6.1 R7.2 R9.2 U1.6 U2.13 | length 3868.6
  Top Layer w10: v2(766,1074) 825,1074 1022,1271 1136.89,1271 v1(1137.89,1272) ; R9.2 1200,436.94 1272.61,509.55 1272.61,534 ; v1(1219,534) 1272.61,534 ; U2.13 1275.55,1191.74 1281.38,1197.57 1281.38,1228.38 1324,1271 ; U1.6 1272.61,534 ; v1(1288,1303) 1320,1271 1324,1271 ; v1(1628,1737) v1(1465,1737) 1377.07,1737 1342.74,1702.67 J6.1 1346,1640.74 1346,1545 1359.08,1531.92 R7.2 1359.08,1306.08 1324,1271
  Bottom Layer w10: v1(1137.89,1272) 1257,1272 v1(1288,1303) ; v1(1219,534) 1465,780 v1(1465,1737) ; v1(1628,1737) 1735,1737 1980,1982 1980,2135 2029,2184 2131,2184
V1: J4.1 R11.1 U1.1 | length 932.3
  Top Layer w10: J4.1 J4.1@727.03,371.97 ; R11.1 718.55,706.55 v1(723,711) 723,751 v1(796,824) 798.93,826.93 989.07,826.93 v1(992,829.85) 1040.4,829.85 1067.75,802.5 1067.75,773.25 v1(1071,770) 1071,692.01 1078.61,684.4 U1.1
  Top Layer w20: J4.1 v1(701,554.45) 718.55,572 R11.1
  other v1: 700,476
V2: J4.2 R11.2 U1.2 | length 724.8
  Top Layer w10: R11.2@781,624.55 R11.2 805.09,648.64 805.09,691.32 811,697.24 v1(811,704) 811,729 863,781 995,781 1046,730 1046,675 1056.8,664.2 U1.2@1082,664.2
  Top Layer w20: R11.2@781,624.55 781,573 796,558 801,553 v1(801,481) J4.2
  other v1: 799,561
V3: C2.1 J3.1 U1.3 | length 879.9
  Top Layer w10: U1.3 1101.11,645.5 1136.5,645.5 1247,756 1355.65,756 1398,713.65 C2.1 1418.5,654 1594,654 1677,571 J3.1
V4: C2.2 J3.2 U1.4 | length 738.6
  Top Layer w10: U1.4 1101.11,624.8 1137.89,624.8 1246.09,733 1310,733 1330,713 1330,647 1359,618 1389.54,618 1396.03,611.5 C2.2 1398,533 1518,413 J3.2
VIN: CN1.08
pads on no net: CN1.01 U2.3 U2.7 U2.10 U2.11
copper on no net: | length 45.7
  Top Layer w10: 995.58,2257.13 995.58,2243.35 1018.14,2220.8

## Polygon pours and split planes (outlines as drawn)
GND on Top Layer "Top_Layer-GND" (solid, remove dead copper, shelved, pour order 6): 229.49,355.48 ccw(c313.26,355.48) 313.26,271.71 409.87,271.71 487.46,194.13 ccw(c491.01,197.68) 491.01,192.65 1790.23,192.65 ccw(c1790.23,197.68) 1793.78,194.13 1871.05,271.4 2257.71,271.4 ccw(c2257.74,273.91) 2257.74,271.39 ccw(c2257.74,355.17) 2341.52,355.17 2341.52,2374.23 ccw(c2269.88,2374.23) 2269.88,2445.87 2268.06,2445.87 ccw(c2267,2440.95) 2267,2445.98 313.88,2445.98 ccw(c313.26,2440.99) 313.26,2446.02 ccw(c313.26,2362.25) 229.53,2364.81 ccw(c234.52,2364.18) 229.49,2364.18 229.49,355.5 ccw(c232,355.48)
V2 on Top Layer "Top Layer-V2" (solid, shelved, pour order 2): 1120.09,670.93 1120.09,655.93 1050.09,655.93 1036.09,669.93 1036.09,725.93 994.09,767.93 872.09,767.93 830.09,663.63 830.09,547.93 876.11,547.93 876.11,272.84 754.09,272.84 757.09,655.93 837.48,795.93 995.09,795.93 1058.89,732.13 1058.89,671.93 1119.09,671.93
V1 on Top Layer "Top Layer-V1" (solid, shelved, pour order 1): 1119,705 1119,677 1069,677 1069,738 996,811 825,811 744,694.83 744,662 744,544 744,274.22 642.5,274.22 649.38,694.83 781.5,854.5 863,854.5 1011,854.5 1119,756
NRST on Top Layer "3V3 POLYGONE" (solid, shelved, pour order 0): 1131.1,1451 1131,1447 1131,1377 1035,1377 1025,1387 1025,1521 1066,1562 1117,1562 1143,1588 1143,1899 1194,1950 1194,2011 1269,2011 1287,2029 1287,2058 1287,2242 1382,2342 1686,2342 1686,2220.79 1405,2220.8 1405,2074.1 1256,1925.1 1256,1724 1250,1724 1220.63,1694.63 1220.63,1579.53 1131.1,1490 1131,1456
GND on Bottom Layer "BottomLayer_GND" (solid, remove dead copper, shelved, pour order 8): 229.49,355.48 ccw(c313.26,355.48) 313.26,271.71 409.87,271.71 487.46,194.13 ccw(c491.01,197.68) 491.01,192.65 1790.23,192.65 ccw(c1790.23,197.68) 1793.78,194.13 1871.05,271.4 2257.71,271.4 ccw(c2257.74,273.91) 2257.74,271.39 ccw(c2257.74,355.17) 2341.52,355.17 2341.52,2374.23 ccw(c2269.88,2374.23) 2269.88,2445.87 2268.06,2445.87 ccw(c2267,2440.95) 2267,2445.98 313.88,2445.98 ccw(c313.26,2440.99) 313.26,2446.02 ccw(c313.26,2362.25) 229.53,2364.81 ccw(c234.52,2364.18) 229.49,2364.18 229.49,355.5 ccw(c232,355.48)

## Keep-outs
Keep-Out Layer:
  lines w5: 234.52,2362.25 cw(c313.26,2362.25) 313.26,2440.99 ; 234.52,2364.18 234.52,355.48 ccw(c313.26,355.48) 313.26,276.74 411.96,276.74 491.01,197.68 1790.23,197.68 1868.97,276.42 1868.97,276.43 2257.74,276.43 ; 311.29,2440.95 2267,2440.95 ; 2257.74,276.42 ccw(c2257.74,355.17) 2336.49,355.17 2336.48,2374.23 ccw(c2269.88,2374.23) 2269.88,2440.84 2261.3,2440.84 ; 232,355.48 ccw(c313.26,355.48) 313.26,274.22 410.92,274.22 489.23,195.91 ccw(c491.01,197.68) 491.01,195.17 1790.23,195.17 ccw(c1790.23,197.68) 1792,195.91 1870.01,273.91 2257.71,273.91 ccw(c2257.74,276.42) 2257.74,273.91 ccw(c2257.74,355.17) 2339,355.17 2339,2374.23 ccw(c2269.88,2374.23) 2269.88,2443.35 2267.74,2443.35 ccw(c2267,2440.95) 2267,2443.47 313.7,2443.47 ccw(c313.26,2440.99) 313.26,2443.51 ccw(c313.26,2362.25) 232.04,2364.59 ; 232,355.48 232,355.5 ; 232,355.5 232,2364.18 cw(c234.52,2364.18) 232.04,2364.59 ; 232.04,2364.59 232.04,2364.59

## Silkscreen, mask and mechanical layers (free items; w line width, h text height)
Top Overlay:
  lines w3: 444,1621 571,1621 594,1644 594,1767 ; 444,2087 570,2087 598,2059 598,1943 ; 467,480 596,480 596,646 596,850 ; 469,1080 596,1080 596,950 ; 629,1036 629,1373 801,1373 801,1036 629,1036
  text "POWER" at 497,2325 h30
  text "SCL" at 1940,2263.35 h40
  text "SDA" at 1940,2162.95 h40
  text "AVDD" at 1918.34,2062.54 h35
  text "VIN" at 463,2033 h40
  text "GND" at 1865.81,1954 h40
  text "GND" at 459,1902 h40
  text "SCK/D13" at 1786.72,1861.73 h40
  text "GND" at 463,1834.67 h40
  text "USER" at 1507,1831 h30
  text "RESET" at 845,1790 h30
  text "POWER" at 616,1784 h30 r90
  text "MISO/D12" at 1753.39,1761.32 h40
  text "5V" at 463,1735.5 h40
  text "OLED SCREEN" at 1069,1729 h30
  text "MOSI/D11" at 1764,1661 h40
  text "3V3" at 463,1636.33 h40
  text "GND" at 1016,1598 h30 r90
  text "SDA" at 1456,1598 h30 r90
  text "PWM/D10" at 1786.72,1560.51 h40
  text "NRST" at 463,1537.17 h40
  text "PWM/D9" at 1820.04,1460.1 h40
  text "IOREF" at 463,1438 h40
  text "TEST" at 666,1391 h20
  text "D8" at 1979.99,1359.69 h40
  text "5V" at 675.99,1327 h30
  text "3V3" at 646,1259.25 h30
  text "GND" at 646,1191.5 h30
  text "SCL" at 646,1123.75 h30
  text "CS/D7" at 1871.81,1123.23 h40
  text "SDA" at 646,1056 h30
  text "PWM/D6" at 1831.82,1023.82 h40
  text "A5" at 481,1020 h40
  text "PWM/D5" at 1831.82,920.47 h40
  text "A4" at 481,919.2 h40
  text "AIN" at 616,860 h40 r90
  text "A3" at 481,818.4 h40
  text "D4" at 1991.77,818.11 h40
  text "PWM/D3" at 1843.55,725.19 h40
  text "A2" at 481,717.6 h40
  text "D2" at 1991.77,621.26 h40
  text "A1" at 481,616.8 h40
  text "A0" at 481,516 h40
  text "TX/D1" at 1885.14,505.12 h40
  text "RX/D0" at 1871.81,412.69 h40
Bottom Overlay:
  text "designed by Atakan" at 1828,1635 h50 r90
  text "I2C SHIELD" at 1255,1516 h60 r90
  text "TEMP" at 1685,313 h30
  text "LOAD" at 802,283 h30

## Text inside footprints (layer, text, board x,y; h text height)
Designator1: Top Overlay "C7" at 914,1134.75 h40
U1: Top Overlay "*" at 1122.83,777 h50; Mechanical 13 "*" at 1117.61,653 h50